# EAGLE board Rage Bridge v2 v123 (EAGLE 9.7.0)
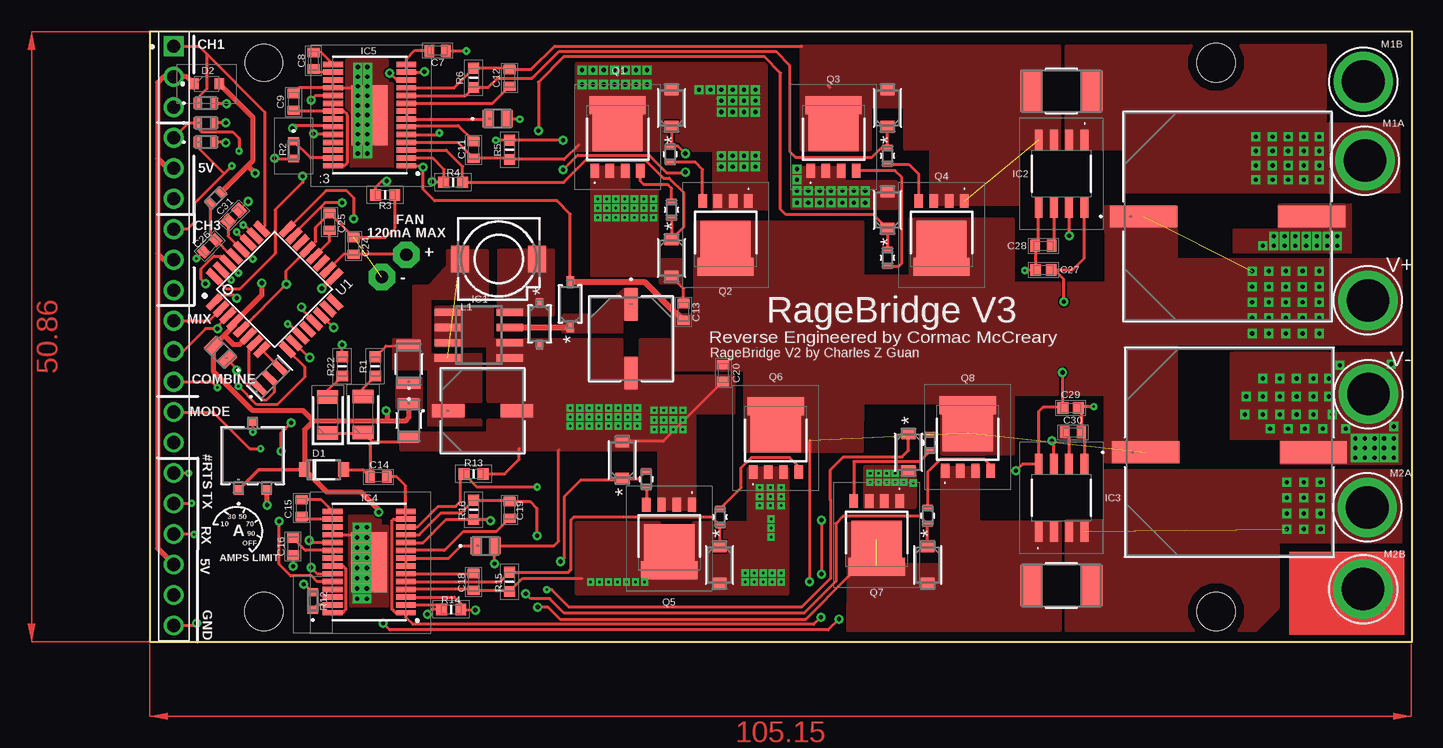
[diagram p0: board, top side]
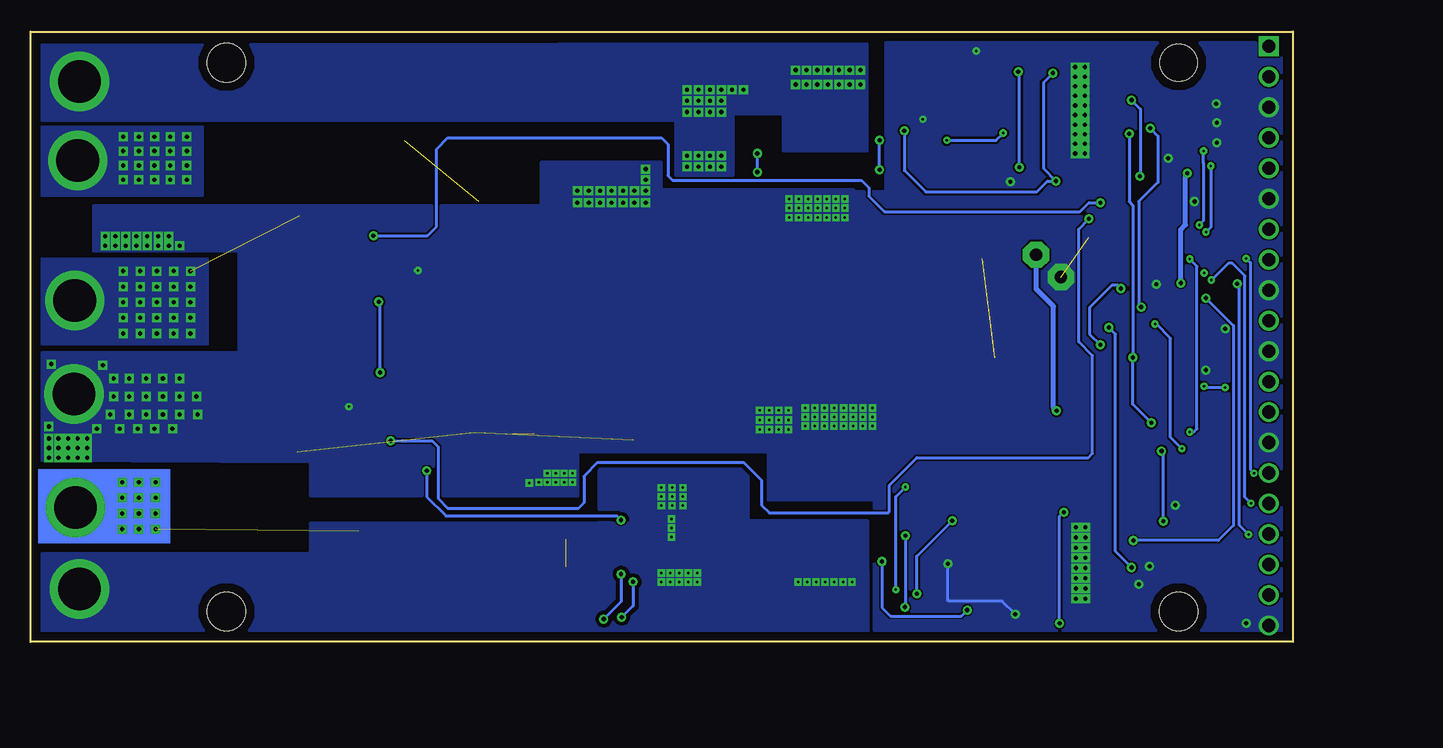
[diagram p1: board, bottom side, seen from below]

Size 105.23 x 50.86 mm. Coordinates in mm from the lower left corner, seen from the top.
Outline: 0,50.86 0,0 105.23,0 105.23,50.86 0,50.86
Copper layers (1*16): Top / Bottom
Stack-up Default Layer Stack: Top User Defined 0.035mm / Dielectric-1 User Defined 1.5mm / Bottom User Defined 0.035mm
Design rules: minimum copper width 6mil, minimum drill size 0.2mm, copper clearance wire_polygon to wire_polygon 6mil, copper clearance wire_polygon to pad_smd 6mil, copper clearance wire_polygon to via 6mil, copper clearance pad_smd to pad_smd 6mil, copper clearance pad_smd to via 6mil, copper clearance via to via 6mil, copper clearance smd to pad (same net) 6mil, copper clearance smd to via (same net) 6mil, copper clearance smd to smd (same net) 6mil, dimension clearance 0.75mm, via restrict clearance 0mil, restrict clearance 0mil, drill distance 6mil, keepout clearance 0mil
Holes 3.1 mm at 9.53,48.26
Holes 3.2 mm at 9.53,2.54 88.9,2.54 88.9,48.26

## Footprints (pad centres in the part's own frame; a part is rotated, then mirrored left to right if it is on the bottom)
CAP_PAN_EEE_J16_PAN-L = smd 5.612 x 1.799: 1 -6.994,0; 2 6.994,0
CAP_PAN_EEE_D_PAN-L = smd 2.691 x 1.062: 1 -2.853,0; 2 2.853,0
CAP_1206X_AVX-L = smd 0.912 x 1.753: 1 -1.396,0; 2 1.396,0
CAP_08051A0R8CAT2A_AVX-L = smd 0.912 x 1.398: 1 -0.799,0; 2 0.799,0
CAPC1608X90N = smd 0.78 x 0.99: 1 -0.7,0; 2 0.7,0
CAP_06033D104JAT2A-L = smd 0.65 x 0.91: 1 -0.7,0; 2 0.7,0
CAPC1608X90N' = smd 0.75 x 0.94: 1 -0.7,0; 2 0.7,0
CAPC1608X95N = smd 0.89 x 0.98: 1 -0.65,0; 2 0.65,0
SOD-123_STM = smd 0.954 x 0.619: 1 -1.854,0; 2 1.854,0
SOD-123_STM-L = smd 0.654 x 0.579: 1 -1.804,0; 2 1.804,0
SMFSERIES_LTF-L = smd 0.989 x 1.144: 1 -1.561,0; 2 1.561,0
SOD123FL = smd 0.91 x 1.22: A 1.625,0; C -1.625,0
SD0805S020S1R0 = smd 0.8 x 0.9: 1 -1.05,0; 2 1.05,0
DPADS_0400-S = drill 1.016 pad 2.184 octagon: PAD 0,0
TSOP8 = smd 0.6 x 2.2: 1 -1.905,-2.6; 2 -0.635,-2.6; 3 0.635,-2.6; 4 1.905,-2.6; 5 1.905,2.6; 6 0.635,2.6; 7 -0.635,2.6; 8 -1.905,2.6
ACS711ELCTR25ABT = smd 0.65 x 1.75: 1 -1.905,-2.8; 2 -0.635,-2.8; 3 0.635,-2.8; 4 1.905,-2.8; 5 1.905,2.8; 6 0.635,2.8; 7 -0.635,2.8; 8 -1.905,2.8
A3944KLPTRT = smd 0.45 x 1.65: 1 -4.225,-3.05; 2 -3.575,-3.05; 3 -2.925,-3.05; 4 -2.275,-3.05; 5 -1.625,-3.05; 6 -0.975,-3.05; 7 -0.325,-3.05; 8 0.325,-3.05; 9 0.975,-3.05; 10 1.625,-3.05; 11 2.275,-3.05; 12 2.925,-3.05; 13 3.575,-3.05; 14 4.225,-3.05; 15 4.225,3.05; 16 3.575,3.05; 17 2.925,3.05; 18 2.275,3.05; 19 1.625,3.05; 20 0.975,3.05; 21 0.325,3.05; 22 -0.325,3.05; 23 -0.975,3.05; 24 -1.625,3.05; 25 -2.275,3.05; 26 -2.925,3.05; 27 -3.575,3.05; 28 -4.225,3.05 | smd 5 x 3: 29 0,0
61302011121 = drill 1.1 square: 1 -24.13,0 | drill 1.1: 2 -21.59,0; 3 -19.05,0; 4 -16.51,0; 5 -13.97,0; 6 -11.43,0; 7 -8.89,0; 8 -6.35,0; 9 -3.81,0; 10 -1.27,0; 11 1.27,0; 12 3.81,0; 13 6.35,0; 14 8.89,0; 15 11.43,0; 16 13.97,0; 17 16.51,0; 18 19.05,0; 19 21.59,0; 20 24.13,0
SLF7045 = smd 1.5 x 2.2: 1 -3.2,0; 2 3.2,0
IND_NLFV32T_TDK = smd 0.914 x 2.007: 1 -1.6,0; 2 1.6,0
LEDC3216X195N = smd 1.1 x 1.75: 1 -1.5,0; 2 1.5,0
4.95/3.55 = drill 3.55 pad 4.95: 1 0,0
PSMN2R055YLHX = smd 0.7 x 1.15: 1 -1.905,-2.737; 2 -0.635,-2.737; 3 0.635,-2.737; 4 1.905,-2.737 | smd 4.7 x 1.5: 5 0,2.737 | smd 4.2 x 3.1: 6 0,0.438
RESC1608X55N = smd 0.9 x 0.95: 1 -0.8,0; 2 0.8,0
ERA3KV_(0603) = smd 0.65 x 0.9: 1 -0.725,0; 2 0.725,0
RES_TNPW0603_VIS-L = smd 0.45 x 0.8: 1 -0.7,0; 2 0.7,0
STA_CSNL2512(0.5)_STP-L = smd 1.778 x 3.378: 1 -2.515,0; 2 2.515,0
RES_CHP0603_BRN-L = smd 0.608 x 0.839: 1 -0.647,0; 2 0.647,0
QFP80P900X900X120-32N = smd 1.5 x 0.55: 1 -4.3,2.8; 2 -4.3,2; 3 -4.3,1.2; 4 -4.3,0.4; 5 -4.3,-0.4; 6 -4.3,-1.2; 7 -4.3,-2; 8 -4.3,-2.8; 17 4.3,-2.8; 18 4.3,-2; 19 4.3,-1.2; 20 4.3,-0.4; 21 4.3,0.4; 22 4.3,1.2; 23 4.3,2; 24 4.3,2.8 | smd 0.55 x 1.5: 9 -2.8,-4.3; 10 -2,-4.3; 11 -1.2,-4.3; 12 -0.4,-4.3; 13 0.4,-4.3; 14 1.2,-4.3; 15 2,-4.3; 16 2.8,-4.3; 25 2.8,4.3; 26 2,4.3; 27 1.2,4.3; 28 0.4,4.3; 29 -0.4,4.3; 30 -1.2,4.3; 31 -2,4.3; 32 -2.8,4.3
ST-4ETB502_NDC-L = smd 0.833 x 0.756: 1 -1.175,-2.872; 2 1.175,-2.872; 3 0,2.872
CSTCE_V_MUR = smd 0.508 x 1.448: 1 -1.2,0; 2 0,0; 3 1.2,0

## Placement (x,y rotation side)
C1  EEE-HD1V152AMCAP_PAN_EEE_J16_PAN-L  [CAP_PAN_EEE_J16_PAN-L]  89.85,35.45 0 top
C2  EEE-HD1V152AMCAP_PAN_EEE_J16_PAN-L  [CAP_PAN_EEE_J16_PAN-L]  90,15.8 0 top
C3  EEE-HA1C101WPCAP_PAN_EEE_D_PAN-L  [CAP_PAN_EEE_D_PAN-L]  27.74,19.26 0 top
C4  12066D107MAT2ACAP_1206X_AVX-L  [CAP_1206X_AVX-L]  21.6,18.45 270 top
C5  08056C104JAT2ACAP_08051A0R8CAT2A_AVX-L  [CAP_08051A0R8CAT2A_AVX-L]  5.9,24.13 135 top
C6  EEE-1VA470WAPCAP_PAN_EEE_D_PAN-L  [CAP_PAN_EEE_D_PAN-L]  40.13,25.26 270 top
C7  06035C105KAT2A  [CAPC1608X90N]  24,49.27 180 top
C8  06035C105KAT2A  [CAPC1608X90N]  13.65,48.43 90 top
C9  06035C105KAT2A  [CAPC1608X90N]  12,45 270 top
C10  08056C104JAT2ACAP_08051A0R8CAT2A_AVX-L  [CAP_08051A0R8CAT2A_AVX-L]  29,43.6 0 top
C11  06035C105KAT2A  [CAPC1608X90N]  27,41 270 top
C12  06035C105KAT2A  [CAPC1608X90N]  30,47 270 top
C13  06035C105KAT2A  [CAPC1608X90N]  44.5,27.5 90 top
C14  06035C105KAT2A  [CAPC1608X90N]  19.07,13.75 0 top
C15  06035C105KAT2A  [CAPC1608X90N]  12.65,11.15 90 top
C16  06035C105KAT2A  [CAPC1608X90N]  11.95,7.95 90 top
C17  08056C104JAT2ACAP_08051A0R8CAT2A_AVX-L  [CAP_08051A0R8CAT2A_AVX-L]  28,8 0 top
C18  06035C105KAT2A  [CAPC1608X90N]  27,5 270 top
C19  06035C105KAT2A  [CAPC1608X90N]  30,11 270 top
C20  06035C105KAT2A  [CAPC1608X90N]  47.8,22.4 270 top
C21  06036A152JAT2ACAP_06033D104JAT2A-L  [CAP_06033D104JAT2A-L]  4.7,44.9 0 top
C22  06036A152JAT2ACAP_06033D104JAT2A-L  [CAP_06033D104JAT2A-L]  4.7,43.25 0 top
C23  06036A152JAT2ACAP_06033D104JAT2A-L  [CAP_06033D104JAT2A-L]  4.7,41.65 0 top
C24  06035C105KAT2A  [CAPC1608X90N]  17,33 270 top
C25  06035C105KAT2A  [CAPC1608X90N]  15,35 270 top
C26  GCM188R71C104KA37J  [CAPC1608X90N']  5,33 45 top
C27  C0603X102K5GACAUTO  [CAPC1608X95N]  74.5,31 180 top
C28  06035C105KAT2A  [CAPC1608X90N]  74.5,33 180 top
C29  C0603X102K5GACAUTO  [CAPC1608X95N]  76.77,19.5 0 top
C30  06035C105KAT2A  [CAPC1608X90N]  76.96,17.46 0 top
C31  C0603X102K5GACAUTO  [CAPC1608X95N]  7,35.5 45 top
CR1  STPS0560ZSOD-123_STM  [SOD-123_STM]  35.05,28.15 90 top
CR2  STPS0560ZSOD-123_STM-L  [SOD-123_STM-L]  32.5,26.5 270 top
CR3  SMF16ASMFSERIES_LTF-L  [SMFSERIES_LTF-L]  43.5,44.5 90 top
CR4  SMF16ASMFSERIES_LTF-L  [SMFSERIES_LTF-L]  61.5,44.5 90 top
CR5  SMF16ASMFSERIES_LTF-L  [SMFSERIES_LTF-L]  61.5,36 90 top
CR6  SMF16ASMFSERIES_LTF-L  [SMFSERIES_LTF-L]  43.5,32 270 top
CR7  SMF16ASMFSERIES_LTF-L  [SMFSERIES_LTF-L]  47.5,6.4 270 top
CR8  SMF16ASMFSERIES_LTF-L  [SMFSERIES_LTF-L]  64.85,6.4 270 top
CR9  SMF16ASMFSERIES_LTF-L  [SMFSERIES_LTF-L]  63.25,15.8 270 top
CR10  SMF16ASMFSERIES_LTF-L  [SMFSERIES_LTF-L]  39.4,15.15 90 top
D1  SMF5.0AT1  [SOD123FL]  14.53,14.35 0 top
D2  SD0805S020S1R0  [SD0805S020S1R0]  4.75,46.5 0 top
E1  DPADS_PAD-0400-S  [DPADS_0400-S]  21.4,32.25 0 top
E2  DPADS_PAD-0400-S  [DPADS_0400-S]  19.35,30.4 0 top
IC1  LM2594  [TSOP8]  27.43,25.57 270 top
IC2  ACS714ELCTR-30A-T  [ACS711ELCTR25ABT]  76,39 180 top
IC3  ACS714ELCTR-30A-T  [ACS711ELCTR25ABT]  76,12 0 top
IC4  A3941KLPTR-T  [A3944KLPTRT]  18.3,6.65 90 top
IC5  A3941KLPTR-T  [A3944KLPTRT]  18.35,43.9 90 top
J1  61302011121  [61302011121]  2,25.5 270 top
L1  SLF7045  [SLF7045]  29.09,31.91 180 top
L2  NLFV32T-3R3M-EFIND_NLFV32T_TDK  [IND_NLFV32T_TDK]  21.59,23.14 90 top
LED1  156120BS82500  [LEDC3216X195N]  17.8,18.95 90 top
LED2  156120BS82500  [LEDC3216X195N]  14.85,18.9 90 top
M1A  4.95/3.55WIREPAD  [4.95/3.55]  101.3,40.1 0 top
M1B  4.95/3.55WIREPAD  [4.95/3.55]  101.16,46.69 0 top
M2A  4.95/3.55WIREPAD  [4.95/3.55]  101.5,11.2 0 top
M2B  4.95/3.55WIREPAD  [4.95/3.55]  101.15,4.4 0 top
Q1  PSMNR90-40YLHX  [PSMN2R055YLHX]  39,42 0 top
Q2  PSMNR90-40YLHX  [PSMN2R055YLHX]  48,34 180 top
Q3  PSMNR90-40YLHX  [PSMN2R055YLHX]  57,42 0 top
Q4  PSMNR90-40YLHX  [PSMN2R055YLHX]  66,34 180 top
Q5  PSMNR90-40YLHX  [PSMN2R055YLHX]  43.3,8.7 180 top
Q6  PSMNR90-40YLHX  [PSMN2R055YLHX]  52.2,16.9 0 top
Q7  PSMNR90-40YLHX  [PSMN2R055YLHX]  60.6,9 180 top
Q8  PSMNR90-40YLHX  [PSMN2R055YLHX]  68.2,17 0 top
R1  CHP0603AFX-1001ELF  [RESC1608X55N]  18.8,22.95 270 top
R2  ERA-3VEB2202V  [ERA3KV_(0603)]  12,41 270 top
R3  CR0603-FX-2703ELF  [RESC1608X55N]  19.64,37.25 0 top
R4  CR0603-FX-2703ELF  [RESC1608X55N]  25.29,38.3 0 top
R5  CR0603-FX-2703ELF  [RESC1608X55N]  30,41 270 top
R6  CR0603-FX-2703ELF  [RESC1608X55N]  27,47 270 top
R7  TNPW0603100KBEEARES_TNPW0603_VIS-L  [RES_TNPW0603_VIS-L]  43.39,40.64 270 top
R8  TNPW0603100KBEEARES_TNPW0603_VIS-L  [RES_TNPW0603_VIS-L]  43.5,36 90 top
R9  TNPW0603100KBEEARES_TNPW0603_VIS-L  [RES_TNPW0603_VIS-L]  61.5,40.5 270 top
R10  TNPW0603100KBEEARES_TNPW0603_VIS-L  [RES_TNPW0603_VIS-L]  61.5,32 270 top
R11  CSNL2512FTL500STA_CSNL2512(0.5)_STP-L  [STA_CSNL2512(0.5)_STP-L]  76,45.9 0 top
R12  ERA-3VEB2202V  [ERA3KV_(0603)]  13.6,3.4 90 top
R13  CR0603-FX-2703ELF  [RESC1608X55N]  27,14 0 top
R14  CR0603-FX-2703ELF  [RESC1608X55N]  25.14,2.7 0 top
R15  CR0603-FX-2703ELF  [RESC1608X55N]  30,5 270 top
R16  CR0603-FX-2703ELF  [RESC1608X55N]  27,11 270 top
R17  TNPW0603100KBEEARES_TNPW0603_VIS-L  [RES_TNPW0603_VIS-L]  47.55,10.4 90 top
R18  TNPW0603100KBEEARES_TNPW0603_VIS-L  [RES_TNPW0603_VIS-L]  41.4,13.55 270 top
R19  TNPW0603100KBEEARES_TNPW0603_VIS-L  [RES_TNPW0603_VIS-L]  64.85,10.5 90 top
R20  TNPW0603100KBEEARES_TNPW0603_VIS-L  [RES_TNPW0603_VIS-L]  65.05,16.6 270 top
R21  CSNL2512FTL500STA_CSNL2512(0.5)_STP-L  [STA_CSNL2512(0.5)_STP-L]  76,4.7 0 top
R22  CHP0603AFX-1001ELF  [RESC1608X55N]  16.05,22.95 270 top
R23  CHP0603AFX-1003ELFRES_CHP0603_BRN-L  [RES_CHP0603_BRN-L]  5.5,37 45 top
U1  ATMEGA328P-AU  [QFP80P900X900X120-32N]  10.41,29.38 45 top
U2  ST-4ETB502ST-4ETB502_NDC-L  [ST-4ETB502_NDC-L]  8.58,15.53 0 top
U3  CSTCE16M0V53A-R0CSTCE_V_MUR  [CSTCE_V_MUR]  10,22 45 top
V+  4.95/3.55WIREPAD  [4.95/3.55]  101.55,28.45 0 top
V-  4.95/3.55WIREPAD  [4.95/3.55]  101.6,20.65 0 top

## Library data of the parts
C1 C2 = Library; COPYRIGHT: Copyright (C) 2023 Ultra Librarian. All rights reserved.; MANUFACTURER_PART_NUMBER: EEE-HD1V152AM; MFR_NAME: Panasonic
C3 = Modified Parts; COPYRIGHT: Copyright (C) 2023 Ultra Librarian. All rights reserved.; DIGI-KEY_PART_NUMBER_1: PCE4180TR-ND; DIGI-KEY_PART_NUMBER_2: PCE4180CT-ND; DIGI-KEY_PART_NUMBER_3: PCE4180DKR-ND; MANUFACTURER_PART_NUMBER: EEE-HA1C101WP; MFR_NAME: Panasonic
C4 = 581-12066D107MAT2A; COPYRIGHT: Copyright (C) 2023 Ultra Librarian. All rights reserved.; MANUFACTURER_PART_NUMBER: 12066D107MAT2A; MFR_NAME: KYOCERA AVX
C5 C10 C17 = 08056C106MAT2A; COPYRIGHT: Copyright (C) 2023 Ultra Librarian. All rights reserved.; MANUFACTURER_PART_NUMBER: 08056C104JAT2A; MFR_NAME: KYOCERA AVX
C6 = Modified Parts; COPYRIGHT: Copyright (C) 2023 Ultra Librarian. All rights reserved.; MANUFACTURER_PART_NUMBER: EEE-1VA470WAP; MFR_NAME: Panasonic
C7-C9 C11-C16 C18-C20 C24 C25 C28 C30 = 06035C105KAT2A; DESCRIPTION: Multilayer Ceramic Capacitors MLCC - SMD/SMT 1.0UF 50V 10% 0603; HEIGHT: 0.9mm; MANUFACTURER_NAME: AVX; MANUFACTURER_PART_NUMBER: 06035C105KAT2A; MOUSER_PART_NUMBER: 581-06035C105KAT2A; MOUSER_PRICE-STOCK: https://www.mouser.co.uk/ProductDetail/AVX/06035C105KAT2A/?qs=%252BdQmOuGyFcGCdIIWh6fU7Q%3D%3D
C21-C23 = 06036A152JAT2A; COPYRIGHT: Copyright (C) 2023 Ultra Librarian. All rights reserved.; MANUFACTURER_PART_NUMBER: 06036A152JAT2A; MFR_NAME: KYOCERA AVX
C26 = GCM188R71C104KA37J; DESCRIPTION: Multilayer Ceramic Capacitors MLCC - SMD/SMT .1uF 16Volts 10%; HEIGHT: 0.9mm; MANUFACTURER_NAME: Murata Electronics; MANUFACTURER_PART_NUMBER: GCM188R71C104KA37J; MOUSER_PART_NUMBER: 81-GCM188R71C104KA7J; MOUSER_PRICE-STOCK: https://www.mouser.co.uk/ProductDetail/Murata-Electronics/GCM188R71C104KA37J?qs=bGEzvQhTDnZD08oWyjLpYQ%3D%3D
C27 C29 C31 = C0603X102K5GACAUTO; DESCRIPTION: SMD Auto C0G Flex, Ceramic, 1000 pF, 10%, 50 VDC, 125 VDC, 125C, -55C, C0G, SMD, MLCC, FT-CAP, Ultra-Stable, Automotive Grade, 0.1 % , 100 GOhms, 4.6 mg, 0603, 1.6mm, 0.8mm, 0.8mm, 0.58mm, 0.45mm, 4000, 78 Weeks, 120; HEIGHT: 0.95mm; MANUFACTURER_NAME: KEMET; MANUFACTURER_PART_NUMBER: C0603X102K5GACAUTO; MOUSER_PART_NUMBER: 80-C0603X102K5GAUTO; MOUSER_PRICE-STOCK: https://www.mouser.co.uk/ProductDetail/KEMET/C0603X102K5GACAUTO?qs=Rp5uXu7WBW%2FQ943CZtK%2F6w%3D%3D
CR1 CR2 = Modified Parts; COPYRIGHT: Copyright (C) 2023 Ultra Librarian. All rights reserved.; MANUFACTURER_PART_NUMBER: STPS0560Z; MFR_NAME: STMicroelectronics
CR3-CR10 = Modified Parts; COPYRIGHT: Copyright (C) 2023 Ultra Librarian. All rights reserved.; MANUFACTURER_PART_NUMBER: SMF16A; MFR_NAME: Littelfuse Inc
D1 = diode
D2 = SD0805S020S1R0; DESCRIPTION: AVX - SD0805S020S1R0 - DIODE, SCHOTTKY, 1A, 20V, SOD-323; HEIGHT: 1mm; MANUFACTURER_NAME: AVX; MANUFACTURER_PART_NUMBER: SD0805S020S1R0; MOUSER_PART_NUMBER: 581-SD0805S020S1R0; MOUSER_PRICE-STOCK: https://www.mouser.co.uk/ProductDetail/AVX-Kyocera/SD0805S020S1R0?qs=jCA%252BPfw4LHbpkAoSnwrdjw%3D%3D
E1 E2 = 52101-101-REV-A_v16; BOM: EXCLUDE
IC1 = LM2594
IC2 IC3 = ACS714ELCTR-30A-T; ARROW_PART_NUMBER: ACS714ELCTR-30A-T; ARROW_PRICE-STOCK: https://www.arrow.com/en/products/acs714elctr-30a-t/allegro-microsystems?region=nac; DESCRIPTION: Automotive Grade, Fully Integrated, Hall-Effect-Based Linear Current Sensor IC with 2.1 kVRMS Voltage Isolation and a Low-Resistance Current Conductor; HEIGHT: 1.75mm; MANUFACTURER_NAME: Allegro Microsystems; MANUFACTURER_PART_NUMBER: ACS714ELCTR-30A-T
IC4 IC5 = A3941KLPTR-T; ARROW_PART_NUMBER: A3941KLPTR-T; ARROW_PRICE-STOCK: https://www.arrow.com/en/products/a3941klptr-t/allegro-microsystems; DESCRIPTION: Automotive Full Bridge MOSFET Driver; HEIGHT: 1.2mm; MANUFACTURER_NAME: Allegro Microsystems; MANUFACTURER_PART_NUMBER: A3941KLPTR-T
J1 = Headers; CREATED_BY: PCBLayout.com; DIGIKEY_PART_NUMBER: 732-5329-ND; MANUFACTURER: Wurth Electronics Inc.; MPN: 61302011121
L1 = inductors; SPICEPREFIX: L
L2 = Modified Parts; COPYRIGHT: Copyright (C) 2023 Ultra Librarian. All rights reserved.; MANUFACTURER_PART_NUMBER: NLFV32T-3R3M-EF; MFR_NAME: TDK
LED1 LED2 = 156120BS82500; DESCRIPTION: 3.9 V Blue LED 3216 (1206) SMD, Wurth Elektronik WL-SMRW 156120BS82500; HEIGHT: 1.95mm; MANUFACTURER_NAME: Wurth Elektronik; MANUFACTURER_PART_NUMBER: 156120BS82500; MOUSER_PART_NUMBER: 710-156120BS82500; MOUSER_PRICE-STOCK: https://www.mouser.co.uk/ProductDetail/Wurth-Elektronik/156120BS82500?qs=5aG0NVq1C4ycHR%252BnBedTqQ%3D%3D
M1A M1B M2A M2B V+ V- = Battery/Output TH
Q1-Q8 = PSMNR90-40YLHX; DESCRIPTION: MOSFET N-CH 40 V LOGIC LEVEL; HEIGHT: 1.25mm; MANUFACTURER_NAME: Nexperia; MANUFACTURER_PART_NUMBER: PSMNR90-40YLHX; MOUSER_PART_NUMBER: 771-PSMNR90-40YLHX; MOUSER_PRICE-STOCK: https://www.mouser.co.uk/ProductDetail/Nexperia/PSMNR90-40YLHX?qs=Zz7%252BYVVL6bENGG9A3AEHCg%3D%3D
R1 R22 = CHP0603AFX-1001ELF; DESCRIPTION: Thick Film Resistors - SMD ResHighPowerA 0603 1k 1% 1/3W TC100; HEIGHT: 0.55mm; MANUFACTURER_NAME: Bourns; MANUFACTURER_PART_NUMBER: CHP0603AFX-1001ELF; MOUSER_PART_NUMBER: 652-CHP0603AFX1001EL; MOUSER_PRICE-STOCK: https://www.mouser.co.uk/ProductDetail/Bourns/CHP0603AFX-1001ELF?qs=BJlw7L4Cy79wF3rZ%2FmXmqQ%3D%3D
R2 R12 = 3VEB2202V; DESCRIPTION: Chip Resistor 0603 (1608 Metric) Anti-Sulfur, Automotive AEC-Q200 Thin Film; HEIGHT: 0.4mm; MANUFACTURER_NAME: Panasonic; MANUFACTURER_PART_NUMBER: ERA-3VEB2202V; MOUSER_PART_NUMBER: 667-ERA-3VEB2202V; MOUSER_PRICE-STOCK: https://www.mouser.co.uk/ProductDetail/Panasonic/ERA-3VEB2202V?qs=OlC7AqGiEDmCEFJMvW451w%3D%3D
R3-R6 R13-R16 = CR0603-FX-2703ELF; DESCRIPTION: Thick Film Resistors - SMD 270K ohm 1%; HEIGHT: 0.55mm; MANUFACTURER_NAME: Bourns; MANUFACTURER_PART_NUMBER: CR0603-FX-2703ELF; MOUSER_PART_NUMBER: 652-CR0603FX-2703ELF
R7-R10 R17-R20 = TNPW060310R0DEEA; COPYRIGHT: Copyright (C) 2023 Ultra Librarian. All rights reserved.; MANUFACTURER_PART_NUMBER: TNPW0603100KBEEA; MFR_NAME: Vishay
R11 R21 = 2023-12-17_00-40-17_Library; COPYRIGHT: Copyright (C) 2023 Ultra Librarian. All rights reserved.; MANUFACTURER_PART_NUMBER: CSNL2512FTL500; MFR_NAME: Stackpole International
R23 = CHP0603AFX-1003ELF; COPYRIGHT: Copyright (C) 2023 Ultra Librarian. All rights reserved.; MANUFACTURER_PART_NUMBER: CHP0603AFX-1003ELF; MFR_NAME: Bourns Electronics
U1 = ATMEGA328P-AU; MANUFACTURER: Atmel
U2 = ST-4ETB502; COPYRIGHT: Copyright (C) 2023 Ultra Librarian. All rights reserved.; MANUFACTURER_PART_NUMBER: ST-4ETB502; MFR_NAME: Nidec Copal Electronics
U3 = CSTCE16M0V53A-R0; COPYRIGHT: Copyright (C) 2023 Ultra Librarian. All rights reserved.; MANUFACTURER_PART_NUMBER: CSTCE16M0V53A-R0; MFR_NAME: Murata

## Nets
#RTS: C26.2 R23.1 U1.29
+5V_LINE: C4.1 C5.2 C24.2 C27.1 C29.1 D1.C D2.2 E1.PAD IC2.8 IC3.8 L2.1 R23.2 U1.4 U1.6 U1.18 U2.1
ADJUST: C31.1 U1.28 U2.3
BAT_V: C1.1 C2.1 C7.2 C13.1 C14.2 C20.1 CR1.2 IC4.1 IC4.13 IC4.14 IC5.1 IC5.13 IC5.14 Q2.5 Q2.6 Q4.5 Q4.6 Q6.5 Q6.6 Q8.5 Q8.6 V+.1
CH1: C21.1 J1.1 U1.25
CH2: C22.1 J1.4 U1.26
CH3: C23.1 J1.7 U1.27
CLK: U1.7 U3.1
CLK(1): U1.8 U3.3
COMBINE: J1.12 U1.9
CPULED: R22.1 U1.17
GHA: CR4.1 IC5.10 R6.2 R9.1
GHA(1): CR8.1 IC4.10 R16.2 R19.1
GHB: CR3.1 IC5.5 R5.1 R7.1
GHB(1): CR7.1 IC4.5 R15.1 R17.1
GLA: CR5.1 IC5.12 R3.1 R10.1
GLA(1): CR9.1 IC4.12 R13.1 R20.1
GLB: CR6.1 IC5.3 R4.2 R8.1
GLB(1): CR10.1 IC4.3 R14.2 R18.1
GND: C1.2 C2.2 C3.2 C4.2 C5.1 C6.2 C7.1 C9.1 C10.2 C13.2 C14.1 C16.1 C17.2 C20.2 C21.2 C22.2 C23.2 C24.1 C25.1 C27.2 C28.2 C29.2 C30.2 C31.2 CR2.2 CR5.2 CR6.2 CR9.2 CR10.2 D1.A E2.PAD IC1.1 IC1.2 IC1.3 IC1.5 IC1.6 IC2.5 IC3.5 IC4.2 IC4.17 IC4.18 IC4.29 IC5.2 IC5.17 IC5.18 IC5.29 J1.3 J1.6 J1.9 J1.11 J1.14 J1.20 LED1.1 LED2.1 Q1.1 Q1.2 Q1.3 Q3.1 Q3.2 Q3.3 Q5.1 Q5.2 Q5.3 Q7.1 Q7.2 Q7.3 R2.2 R3.2 R4.1 R12.2 R13.2 R14.1 U1.3 U1.5 U1.21 U2.2 U3.2 V-.1
MIX: J1.10 U1.2
MODE: J1.13 U1.11
N$1: C12.2 IC5.9
N$2: C8.2 IC5.15
N$3: C6.1 CR1.1 IC1.7
N$5: CR2.1 IC1.8 L1.1
N$6: C3.1 IC1.4 L1.2 L2.2 R1.1
N$7: IC2.1 IC2.2 M1A.1 R11.2
N$8: LED1.2 R1.2
N$9: IC5.27 R2.1
N$11: C11.1 IC5.6
N$12: C17.1 IC4.7 IC4.8
N$15: Q2.4 R7.2
N$16: Q8.4 R19.2
N$18: C16.2 IC4.20 IC4.21 IC4.22 IC4.28
N$22: C15.1 IC4.16
N$23: C15.2 IC4.15
N$24: IC3.3 IC3.4 M2A.1 R21.2
N$29: Q6.4 R17.2
N$31: Q1.4 R8.2
N$32: Q3.4 R10.2
N$33: C26.1 J1.15
N$34: IC4.27 R12.1
N$35: C10.1 IC5.7 IC5.8
N$36: C8.1 IC5.16
N$39: C9.2 IC5.20 IC5.21 IC5.22 IC5.28
N$41: C19.2 IC4.9
N$42: C18.1 IC4.6
N$49: Q5.4 R18.2
N$50: Q7.4 R20.2
N$52: C28.1 IC2.6
N$61: LED2.2 R22.2
N$63: C25.2 U1.20
N$73: C30.1 IC3.6
N$79: Q4.4 R9.2
PHASE: IC5.19 U1.32
PHASE(1): IC4.19 U1.1
PIN_5V: D2.1 J1.2 J1.5 J1.8 J1.18
PWMH: IC5.23 U1.13
PWMH(1): IC4.23 U1.14
RESET: IC4.24 IC5.24 U1.10
RX: J1.17 U1.30
SA: C12.1 CR4.2 IC2.3 IC2.4 IC5.11 Q3.5 Q3.6 Q4.1 Q4.2 Q4.3 R6.1 R11.1
SA(1): C19.1 CR8.2 IC3.1 IC3.2 IC4.11 Q7.5 Q7.6 Q8.1 Q8.2 Q8.3 R16.1 R21.1
SB: C11.2 CR3.2 IC5.4 M1B.1 Q1.5 Q1.6 Q2.1 Q2.2 Q2.3 R5.2
SB(1): C18.2 CR7.2 IC4.4 M2B.1 Q5.5 Q5.6 Q6.1 Q6.2 Q6.3 R15.2
TX: J1.16 U1.31
VIOUT: IC2.7 U1.23
VIOUT(1): IC3.7 U1.24

## Tracks (layer width: path | path; a pad name or v marks a point on that pad's centre or on a via)
#RTS
  Top 0.254: R23.1 5.04,33.95 C26.2 6.85,32.14 U1.29
+5V_LINE  (via drill 0.35)
  Top 0.254: C5.2 | U1.18 16.16,32.3 C24.2 21.35,32.3 E1.PAD | 76.07,19.55 74.45,19.55 74.09,19.2 IC3.8 72.75,14.8 v72.2,14.25 | 76.07,19.55 C29.1 | C27.1 75.4,31 | 75.4,31 76.95,31 77.91,31.95 IC2.8 | v56,10.15 v56,5.65 | v57.45,1.9 56.55,1 20,1 v19.45,1.55 | v76.1,22.45 76.07,22.42 76.07,19.55 | v76.2,28.35 76.2,30.2 75.4,31
  Top 0.305: U2.1 9.1,14.35 D1.C
  Top 0.406: 6.2,25.55 C5.2 | 6.2,25.55 6.95,24.8 7.53,24.8 U1.6 | C4.1 21.6,18.7 21.3,18.4 19.8,18.4 | C5.2 5.35,22.5 8.56,19.29 12.76,19.29 13.62,18.43 13.62,18.4 | R23.2 8.18,39.67 | 8.18,39.67 8.6,40.1 8.6,43.7 D2.2 | v9.35,29.9 9.35,28.89 U1.4 7.09,26.45 6.2,25.55 | v8.8,39.05 8.18,39.67 | v19.7,19.25 19.8,19.15 19.8,18.4 | 19.8,18.4 13.62,18.4 | 13.62,18.4 12.9,17.68 D1.C 14.76,12.5 17.6,12.5 19.1,11 v19.1,10.8
  Bottom 0.254: v72.2,14.25 72.2,12.1 70.6,10.5 56.35,10.5 v56,10.15 | v57.45,1.9 56,3.35 v56,5.65 | v19.45,1.55 19.45,10.45 v19.1,10.8 | v76.1,22.45 76.1,28.25 v76.2,28.35
  Bottom 0.406: v9.35,29.9 9.35,34.35 8.95,34.75 8.95,38.75 v8.8,39.05 | v19.7,19.25 19.95,19.5 19.95,27.95 21.4,29.4 E1.PAD
  pour Top (no thermals): 20.5,22.05 22.75,22.05 22.75,19.3 20.5,19.3
ADJUST  (via drill 0.2)
  Top 0.254: U2.3 8.58,17.52 v8.6,17.5 | C31.1 6.54,33.81 U1.28 8.46,31.9 v8.6,31.9
  Bottom 0.254: v8.6,17.5 8.25,17.5 8,17.75 8,31.3 v8.6,31.9
BAT_V  (via drill 0.35)  (3 unrouted)
  Top 0.254: C7.2 23.15,49.27 23.12,49.3 22.1,49.3 21.4,48.6 IC5.14 IC5.13 22.88,47.48 v22.9,47.5 | IC5.1 22.68,39.67 v22.8,39.55 22.8,37.7 23.75,36.75 33.95,36.75 35.05,35.65 CR1.2 | C14.2 20.6,13.75 21.35,13 IC4.14 IC4.13 20.32,10.22 20.2,10.1 20.2,2.7 20.48,2.42 IC4.1 21.35,2.05 21.95,1.45 55.35,1.45 v55.95,2.05 | 55,16.8 v55,5
  Top 0.508: C13.1 43.9,27.4 43.84,27.4 41.24,30 CR1.2
  Bottom 0.254: v22.8,39.55 22.8,47.3 22.9,47.4 v22.9,47.5 | v55,5 55,3 v55.95,2.05
  other vias: 97.5,30.9 97.5,29.6 97.5,28.3 97.5,27 97.5,25.7 96.1,30.9 96.1,29.6 96.1,28.3 96.1,27 96.1,25.7 94.7,30.9 94.7,29.6 94.7,28.3 94.7,27 94.7,25.7 93.3,30.9 93.3,29.6 93.3,28.3 93.3,27 93.3,25.7 91.9,30.9 91.9,29.6 91.9,28.3 91.9,27 91.9,25.7
  pour Top (no thermals): 59.54,20.76 59.54,35.1 45.35,35.1 45.35,27.35 43.7,27.35 43.7,22.55 49.5,22.55 49.5,15.75 59.5,15.75
  pour Top (no thermals): 58.75,30.6 63.3,30.6 63.3,35.35 72.1,35.35 72.1,15.55 65.9,15.55 65.9,19.8 58.75,19.8 58.75,19.7
  pour Top (no thermals): 71.35,30 81.8,30 81.8,20.5 71.3,20.5 71.3,20.25
  pour Top (no thermals): 79.6,36.4 85.7,36.4 85.7,14.9 99.2,14.9 79.54,14.9 79.54,22.96 79.69,23.1
  pour Top (no thermals): 104.95,24.7 83.2,24.7 83.2,31.95 104.85,31.95
  pour Bottom (no thermals): 105,24.7 90.4,24.7 90.4,32 105,32
CH1
  Top 0.254: J1.1 4.12,49.63 4.75,49 | C21.1 4.17,45.07 4.17,45.51 4.75,46.09 4.75,49 | U1.25 9.6,34.65 9.6,44.15 4.75,49
CH2  (via drill 0.2)
  Top 0.254: U1.26 7.87,34.75 v7.8,34.75 | J1.4 3.24,43.25 C22.1 4.17,43.08 4.17,42.64 4.31,42.5 6.9,42.5 7.45,41.95 v7.45,40.9
  Bottom 0.254: v7.45,40.9 7.45,39.87 7.43,39.89 7.43,35.12 v7.8,34.75
CH3  (via drill 0.2)
  Top 0.254: v7.25,34.15 8.13,33.27 U1.27 | J1.7 3.14,34.39 3.7,34.95 3.7,36.5 v6.85,39.65 6.21,39.01 4.17,41.04 4.17,41.48 C23.1
  Bottom 0.254: v6.85,39.65 6.85,34.55 v7.25,34.15
CLK
  Top 0.254: U3.1 8.25,22.05 8.25,24.39 U1.7
CLK(1)
  Top 0.254: U1.8 U3.3
COMBINE  (via drill 0.2)
  Top 0.254: v5.65,21.2 5.16,21.69 J1.12 | U1.9 12.9,22.93 12.9,22.05 10.62,19.77 8.93,19.77 v7.4,21.3
  Bottom 0.254: v7.4,21.3 7.3,21.2 v5.65,21.2
CPULED  (via drill 0.35)
  Top 0.254: R22.1 v16.05,24.75
  Top 0.406: v14.35,29.45 15.34,30.44 U1.17
  Bottom 0.254: v16.05,24.75 16.95,25.65 16.95,27.85 15.1,29.7 14.6,29.7 v14.35,29.45
GHA
  Top 0.254: CR4.1 R9.1 61.43,41.13 60.95,41.13 60.22,40.4 53.85,40.4 53.35,40.9 53.35,48.05 52.19,49.21 34.11,49.21 31.87,46.97 28.99,46.97 28.22,46.2 R6.2 26.32,45.52 IC5.10
GHA(1)  (via drill 0.35)
  Top 0.254: CR8.1 R19.1 64.2,10.45 57.8,10.45 57.2,9.85 57.2,5.05 54.55,2.4 34.55,2.4 33.35,3.6 31.75,3.6 v31.35,4 | IC4.10 22.77,8.28 24.7,10.2 R16.2 28.3,10.2 v28.4,10.1
  Bottom 0.254: v31.35,4 31.35,7.15 v28.4,10.1
GHB  (via drill 0.2, 0.35)
  Top 0.254: CR3.1 43.5,41.34 R7.1 44.01,41.34 v44.65,40.7 | v34.45,39.35 34.48,39.35 35.68,40.56 41.64,40.56 43.14,39.06 44.56,39.06 v44.65,39.15 | v28.85,41.8 R5.1 v34.45,41.8 | IC5.5 24.02,42.27 v24.15,42.4
  Bottom 0.254: v44.65,39.15 v44.65,40.7 | v34.45,39.35 v34.45,41.8 | v28.85,41.8 24.75,41.8 v24.15,42.4
GHB(1)
  Top 0.254: CR7.1 47.5,9.7 R17.1 46.85,10.4 35.35,10.4 35.1,10.15 35.1,6 34.9,5.8 R15.1 29.23,5.03 IC4.5
GLA  (via drill 0.35)
  Top 0.254: R10.1 CR5.1 60.34,35.6 53.05,35.6 52.6,36.05 52.6,47.4 51.25,48.75 34.5,48.75 32.4,46.65 v32.4,42.6 | v19.75,38.4 19.35,38.4 18.84,37.89 R3.1 | v20,47.4 20.57,46.83 IC5.12
  Bottom 0.254: v20,47.4 20.8,46.6 20.8,39.45 v19.75,38.4 20.45,38.4 21.35,37.5 30.6,37.5 32.4,39.3 v32.4,42.6
GLA(1)  (via drill 0.2)  (1 unrouted)
  Top 0.254: v32.3,12.9 27.3,12.9 R13.1 25.9,13.7 25.9,11.7 25.5,11.3 24.05,11.3 22.32,9.57 IC4.12 | v33.1,4.35 33.5,4.35 34.95,2.9 54.35,2.9 56.75,5.3 56.75,11.7 56.75,11.82 56.75,14.35 57.82,15.42 62.72,15.42 63.25,15.95 CR9.1
  Bottom 0.254: v33.1,4.35 33.1,12.1 v32.3,12.9
GLB
  Top 0.254: IC5.3 24.73,40.98 26.1,39.6 R4.2 34.5,38.3 36.35,40.15 41.34,40.15 42.84,38.65 43.3,38.65 44.5,37.45 44.5,34.56 CR6.1 R8.1
GLB(1)  (via drill 0.35)
  Top 0.254: v27.15,2.65 25.99,2.65 R14.2 25.94,3.16 25.38,3.73 IC4.3 | v34.25,6.7 34.55,7 34.55,12.1 35.9,13.45 39.26,13.45 CR10.1 40.74,13.59 R18.1
  Bottom 0.254: v27.15,2.65 27.65,2.15 33.55,2.15 34.25,2.85 v34.25,6.7
GND  (via drill 0.2, 0.35, 0.35 pad 0.55)  (1 unrouted)
  Top 0.254: CR6.2 44.5,29.44 C13.2 | J1.20 3.72,1.37 v3.9,1.55 | v23.15,2.3 23.55,2.7 R14.1 23.98,3.08 IC4.2 | v28.75,6.5 28.75,7.95 C17.2 33.7,8 34.1,8.4 34.1,16 | 18.6,16.65 LED1.1 17.75,17.4 LED2.1 | 20.85,16.65 18.6,16.65 | IC3.5 77.91,17.46 C30.2 77.66,19.26 C29.2 77.52,19.6 v78.7,19.6 | v72.95,30.95 73.8,30.95 C27.2 73.85,32.95 C28.2 74.09,33.3 IC2.5 | C7.1 26.4,49.27 v26.4,49.25 | v30.85,43.55 29.85,43.55 C10.2 | R3.2 20.44,34.49 19.65,33.7 C24.1 C25.1 13.85,34.55 13.85,33.39 U1.21 11.39,30.93 v11.39,29.8 U1.5 8.7,27.1 | U1.3 5.65,26.32 v5.65,26.1 4.65,26.1 2.78,24.23 J1.11 | C5.1 7.25,22.78 v7.25,22.65 7.25,22.3 9.37,20.18 9.75,20.18 10.4,20.84 10.4,21.61 10.05,21.97 10.03,21.97 U3.2 | v23.55,38.35 23.6,38.3 R4.1 24.55,38.3 24.55,39.35 23.57,40.33 IC5.2 | IC5.18 IC5.17 | IC5.18 17.23,46.17 v17.35,46.3 | C9.1 12.47,46.17 IC5.18 | v12.84,4.8 12.93,4.8 R12.2 | C16.1 v11.95,6.3 | IC4.17 IC4.18 17.07,8.93 v17.3,8.7 | C20.2 42.81,16.71 CR10.2 | v8.2,36.7 C31.2 | C21.2 6.35,44.9 v6.4,44.85 | v6.35,43.25 C22.2 | C23.2 6.3,41.65 v6.35,41.6 | v10.4,40.3 10.43,40.27 R2.2 | 18.6,16.65 18.37,16.42 C14.1 17.77,14.35 D1.A | R13.2 29.6,14 30.8,15.2 30.8,16.1
  Top 0.406: U2.2 9.76,11.45 v9.8,11.4
  Bottom 0.254: v23.15,2.3 24.25,3.4 28.7,3.4 28.75,3.45 v28.75,6.5
  other vias: 42.05,17.7 42.85,17.7 43.65,17.7 44.45,17.7 44.45,18.5 43.65,18.5 42.85,18.5 42.05,18.5 42.05,19.3 42.85,19.3 43.65,19.3 44.45,19.3 40.65,19.5 39.85,19.5 39.05,19.5 40.65,18.75 39.85,18.75 39.05,18.75 39.05,18 39.85,18 40.65,18 38.25,18 38.25,18.75 38.25,19.5 37.45,19.5 37.45,18.75 37.45,18 36.65,18 36.65,18.75 36.65,19.5 35.85,18 35.85,18.75 35.85,19.5 35.05,18 35.05,18.75 35.05,19.5 60.05,14.05 60.75,14.05 61.45,14.05 62.15,14.05 63.65,13.25 60.05,13.3 60.75,13.3 61.45,13.3 62.15,13.3 62.85,13.3 37.35,36.9 38.1,36.9 38.85,36.9 39.6,36.9 40.4,36.9 41.2,36.9 42,36.9 42,36.15 41.2,36.15 40.4,36.15 39.6,36.15 38.85,36.15 38.1,36.15 37.35,36.15 37.35,35.35 38.1,35.35 38.85,35.35 39.6,35.35 40.4,35.35 41.2,35.35 42,35.35 54.9,37.6 55.85,37.6 56.8,37.6 57.75,37.6 58.7,37.6 59.65,37.6 54.9,36.6 55.85,36.6 56.8,36.6 57.75,36.6 58.7,36.6 59.65,36.6 53.95,36.6 53.95,37.6 53.95,38.5 53.95,39.4 100.5,16.95 101.3,16.95 102.1,16.95 102.9,16.95 102.9,16.15 102.1,16.15 101.3,16.15 100.5,16.15 100.5,15.35 101.3,15.35 102.1,15.35 102.9,15.35 103.7,16.95 103.7,16.15 103.7,15.35 94.6,33 95.5,33 96.4,33 97.3,33 93.7,33 94.6,33.8 93.7,33.8 92.8,33 97.3,33.8 96.4,33.8 99,33 99,33.8 95.5,33.8 17.3,9.55 17.3,7.85 17.3,7 17.3,6.15 17.3,5.3 17.3,4.45 17.3,3.6 18.1,3.6 18.1,4.45 18.1,5.3 18.1,6.15 18.1,7 18.1,7.85 18.1,8.7 18.1,9.55 17.35,40.7 17.35,41.5 17.35,42.3 17.35,43.1 17.35,43.9 17.35,44.7 17.35,45.5 17.35,47.1 17.35,47.9 18.15,47.9 18.15,47.1 18.15,46.3 18.15,45.5 18.15,44.7 18.15,43.9 18.15,43.1 18.15,42.3 18.15,41.5 18.15,40.7 98.16,33.8 98.16,33 91.3,18.95 91.4,20.45 95.6,20.45 97,20.45 97,18.95 95.6,18.95 94.2,18.95 92.8,18.95 93.4,17.75 94.9,17.75 96.3,17.75 97.8,17.75 98.3,20.45 98.6,18.95 99.7,17.75 94.2,21.95 95.6,21.95 97,21.95 103.5,23.15 103.7,17.95 92.8,21.95 94.2,20.45 92.8,20.45 99.2,23.05 98.3,21.95
  pour Top (no thermals): 20.83,15.9 42.35,15.9 42.35,10.8 45.55,10.8 45.55,18.95 48.8,18.95 48.8,22.25 43.4,22.25 43.4,25.3 28.65,25.3 28.65,28 23.75,28 23.75,24.55 28.1,24.55 28.1,17.5 20.75,17.5
  pour Top (no thermals): 36.75,39.7 36.75,30.4 44.5,30.4 44.5,31.95 40.05,31.95 40.05,39.65
  pour Top (no thermals): 42.45,30.55 42.45,29.8 44.45,29.8 44.45,30.6
  pour Top (no thermals): 40,37.7 42.4,37.7 42.4,31.45 40.05,31.45 40.05,31.6
  pour Top (no thermals): 53.4,39.65 53.4,36 62.35,36 62.35,38.45 58,38.45 58,39.65
  pour Top (no thermals): 90.05,14.75 90.05,24.15 104.85,24.15 104.85,14.75
  pour Bottom (no thermals): 106.55,24.2 106.55,16.01 105.55,15.01 106.55,24.2 87.95,24.2 87.95,32.45 100.1,32.45 100.1,36.45 62.75,36.45 62.75,40.1 52.55,40.1 52.55,37.8 36.5,37.8 36.5,20.5 34.45,20.5 34.45,11.7 43.85,11.7 43.85,15.7 59.5,15.7 59.5,12.05 82,12.05 82,14.9 105.33,15.02 109.25,18.93 109.25,21.5
  pour Bottom (no thermals): 36.8,37.65 34.05,37.65 34.05,50.15 -0.05,50.15 -0.05,0 35,0 35,19.75 37.2,19.75 37.2,19.45
  pour Top (no thermals): 16.55,10.6 16.55,2.9 20,2.9 20,9.75 19.35,9.75 19.35,10.6
  pour Top (no thermals): 16.35,39.55 16.35,48.6 19.9,48.6 19.9,46.65 20.35,46.65 20.35,39.55
  pour Top (no thermals): 94.25,16.7 94.25,14.9 104.85,14.9 104.85,16.65
  pour Top (no thermals): 100.2,32.4 90.3,32.4 90.3,36.5 100.2,36.5
  pour Top (no thermals): 59.5,11.1 59.5,14.7 63.9,14.7 63.9,11.1
MIX
  Top 0.254: J1.10 4.97,26.77 U1.2
MODE  (via drill 0.2)
  Top 0.254: v9.25,16.1 8.35,16.1 5.3,19.15 J1.13 | v11.5,26.5 11.59,26.5 U1.11
  Bottom 0.254: v9.25,16.1 10.2,17.05 10.2,25.3 11.4,26.5 v11.5,26.5
N$1
  Top 0.254: C12.2 28.57,44.88 IC5.9
N$2
  Top 0.254: IC5.15 14.3,49.13 C8.2
N$3
  Top 0.508: CR1.1 34.96,26.2 IC1.7
  pour Top (no thermals): 34.35,25.7 40.7,25.7 40.7,29.5 39.6,29.5 39.6,27.35 34.41,27.35
  pour Top (no thermals): 36.63,27 39.7,27 39.7,29.63
N$5
  pour Top (no thermals): 28.95,27.15 33.75,27.15 33.75,32.75 28.98,32.75
N$6  (1 unrouted)
  Top 0.254: R1.1 19.69,24.64 L2.2
  pour Top (no thermals): 23.15,17.95 27.7,17.95 27.7,24.05 23.45,24.05 23.45,25.3 20.2,25.3 20.2,22.65 23.15,22.65
  pour Top (no thermals): 24.7,32.7 28.25,32.7 28.25,28.5 23.45,28.5 23.45,25 21.9,25 21.9,29.75 24.7,29.75
  pour Top (no thermals): 22.83,29.3 25.1,29.3 25.1,31.79
N$7  (via drill 0.35)
  other vias: 97.5,42.1 97.5,40.9 97.5,39.7 97.5,38.5 96.2,38.5 96.2,39.7 96.2,40.9 96.2,42.1 94.9,42.1 94.9,40.9 94.9,39.7 94.9,38.5 93.6,38.5 93.6,39.7 93.6,40.9 93.6,42.1 92.2,42.1 92.2,40.9 92.2,39.7 92.2,38.5
  pour Top (no thermals): 76.3,49.75 76.3,40.95 81.35,40.95 81.35,37.4 104.25,37.4 104.25,43.25 98.1,43.25 98.1,49.85
  pour Bottom (no thermals): 107.2,37.1 90.8,37.1 90.8,43 107.2,43
N$8
  Top 0.254: LED1.2 17.8,21.15 R1.2
N$9
  Top 0.254: IC5.27 13.4,40.33 R2.1
N$11
  Top 0.254: C11.1 27,41.75 25.73,43.02 21.5,43.02 IC5.6
N$12
  Top 0.254: C17.1 25.95,8 24.93,6.97 IC4.8 IC4.7
N$13
  pour Top (no thermals): 99.25,36.45 81.25,36.35 83.2,36.35
N$15
  Top 0.254: Q2.4 46.09,39.35 45.5,39.95 R7.2
N$16
  Top 0.254: Q8.4 70.11,14.7 69.6,15.2 65.91,15.2 64.85,14.14 R19.2
N$18
  Top 0.254: IC4.28 16.07,2.42 16.35,2.7 16.35,6.1 16.12,6.33 IC4.22 IC4.21 IC4.20 12.97,7.62 C16.2
N$22
  Top 0.254: IC4.16 12.88,10.22 C15.1
N$23
  Top 0.254: IC4.15 14.28,11.85 C15.2
N$24  (via drill 0.35)  (1 unrouted)
  other vias: 97.6,13.3 97.6,12 97.6,10.7 97.6,9.4 96.2,9.4 96.2,10.7 96.2,12 94.8,9.4 94.8,10.7 94.8,12 94.8,13.3 96.2,13.3
  pour Top (no thermals): 76.3,0.61 76.3,10.2 94.15,10.2 94.15,2.75 91.97,0.57
  pour Top (no thermals): 104.6,8.2 104.6,14.4 79.5,14.4 79.5,8.2
N$29
  Top 0.254: Q6.4 54.1,14.6 53.35,15.35 50.15,15.35 49.3,14.5 49.3,12.85 R17.2
N$31
  Top 0.254: Q1.4 40.91,38.4 41.2,38.1 43.2,38.1 43.5,37.8 R8.2
N$32
  Top 0.254: R10.2 62.45,31.3 62.7,31.55 62.7,38.7 62.14,39.26 Q3.4
N$33  (via drill 0.2)
  Top 0.254: C26.1 3.95,31.95 v3.9,31.95 | v3.25,14.05 3.23,14.07 J1.15
  Bottom 0.254: v3.9,31.95 3.55,31.6 3.55,14.35 v3.25,14.05
N$34
  Top 0.254: IC4.27 14,3.08 R12.1
N$35
  Top 0.254: 21.43,43.55 28.15,43.55 C10.1 | IC5.7 21.43,43.55 | IC5.8 21.43,44.2 21.43,43.55
N$36
  Top 0.254: IC5.16 13.9,47.48 C8.1
N$39
  Top 0.254: IC5.21 IC5.20 | IC5.21 IC5.22 | IC5.21 12.07,44.23 C9.2 | IC5.21 16.18,44.23 16.45,43.95 16.45,39.9 16.23,39.67 IC5.28
N$41
  Top 0.254: C19.2 28.9,9.2 26.15,9.2 25.15,8.2 25.06,8.11 24.57,7.62 IC4.9
N$42
  Top 0.254: IC4.6 26.98,5.67 C18.1
N$49
  Top 0.254: R18.2 Q5.4
N$50
  Top 0.254: Q7.4 58.7,15.01 64.16,15.01 R20.2
N$52
  Top 0.254: IC2.6 75.36,33.16 C28.1
N$61
  Top 0.254: LED2.2 14.85,20.95 R22.2
N$63
  Top 0.254: U1.20 15,33.4 C25.2
N$73
  Top 0.254: C30.1 76.64,17.09 IC3.6
N$79
  Top 0.254: R9.2 63.3,39.8 64.1,39 Q4.4
PHASE  (via drill 0.35)
  Top 0.254: v12.75,38.8 12.75,38.3 10.45,36 10.45,32.35 7.5,29.4 6.43,29.4 U1.32 | v13.45,45.15 13.82,45.52 IC5.19
  Bottom 0.254: v13.45,45.15 12.7,44.4 12.7,38.85 v12.75,38.8
PHASE(1)  (via drill 0.35)
  Top 0.254: U1.1 5.97,28.9 7,28.9 v7.25,28.65 | v13.3,8.45 13.47,8.28 IC4.19
  Bottom 0.254: v13.3,8.45 6.2,8.45 4.95,9.7 4.95,26.35 v7.25,28.65
PIN_5V
  Top 0.406: 0.65,40.3 0.65,46.6 1.14,47.09 J1.2 3.1,47.09 D2.1 | 0.65,40.3 0.65,32.35 | 0.65,32.35 1.15,31.85 J1.8 | 0.65,32.35 0.65,7.8 J1.18 | J1.5 1.48,39.47 0.65,40.3
PWMH  (via drill 0.35)
  Top 0.254: v12.65,27.9 12.65,27.71 U1.13 | IC5.23 15.2,43.02 12.12,43.02 v11.9,42.8
  Bottom 0.254: v12.65,27.9 12.85,28.1 12.85,36.7 11.25,38.3 11.25,42.15 v11.9,42.8
PWMH(1)  (via drill 0.35)
  Top 0.254: v15.35,26.2 15.29,26.2 U1.14 | v13.45,6.2 13.97,5.67 IC4.23
  Bottom 0.254: v13.45,6.2 14.8,7.55 14.8,25.65 v15.35,26.2
RESET  (via drill 0.35)
  Top 0.254: v10.8,10.05 10.8,6.45 11.74,5.51 13.49,5.51 13.97,5.03 IC4.24 | v10.95,15.9 10.95,17.4 v11.8,18.25 | v13.35,23.7 13.26,23.7 U1.10 | v13.65,42.35 15.22,42.35 IC5.24
  Bottom 0.254: v10.8,10.05 10.8,15.75 v10.95,15.9 | v11.8,18.25 13.35,19.8 v13.35,23.7 13.35,36.4 13.65,36.7 v13.65,42.35
RX  (via drill 0.2, 0.35)
  Top 0.254: v7.4,30.75 7.34,30.75 U1.30 5.94,32.15 5.35,32.15 4.3,31.1 4.3,30.2 v4.65,29.85 | v3.7,8.95 2.04,8.95 J1.17
  Bottom 0.254: v3.7,8.95 4.45,9.7 4.45,29.65 v4.65,29.85
SA  (1 unrouted)
  Top 0.254: 56.55,46.35 56.7,46.2 | 54.35,49.6 54.31,49.64 33.75,49.64 31.81,47.7 C12.1 29.9,47.8 R6.1 25.38,46.17 IC5.11
  pour Top (no thermals): 54.2,40.9 54.2,49.75 75.95,49.75 75.95,40.95 62.85,40.95 62.85,44.45 60.15,44.45 60.15,40.9
  pour Top (no thermals): 65,36.35 65,41.1 72.5,41.1 72.5,36.35
SA(1)  (via drill 0.35)  (1 unrouted)
  Top 0.254: v32.35,2.9 33.2,2.9 34.2,1.9 54.7,1.9 58.25,5.45 | v32.3,8.85 32.3,11.1 31.7,11.7 C19.1 29.9,11.8 R16.1 25.95,10.75 24.3,10.75 22.48,8.93 IC4.11
  Bottom 0.254: v32.3,8.85 32.3,2.95 v32.35,2.9
  pour Top (no thermals): 58.15,9.95 59.9,9.95 59.9,6.55 65.9,6.55 65.9,14.65 69.2,14.65 69.2,10.1 76,10.1 76,0.65 58.09,0.65
SB  (via drill 0.35)
  Top 0.254: IC5.4 25.68,41.62 C11.2 29.9,40.3 R5.2 34.55,40.2 35.75,41.4
  other vias: 47.65,45.1 48.6,45.1 49.55,45.1 50.5,45.1 50.5,44.15 49.55,44.15 48.6,44.15 47.65,44.15 47.65,40.5 48.6,40.5 49.55,40.5 50.5,40.5 50.5,39.6 49.55,39.6 48.6,39.6 47.65,39.6 36.05,46.45 36.95,46.45 37.85,46.45 38.75,46.45 39.65,46.45 40.55,46.45 41.45,46.45 47.65,46 48.6,46 49.55,46 50.5,46 46.75,46 45.8,46 36.05,47.65 36.95,47.65 37.85,47.65 38.75,47.65 39.65,47.65 40.55,47.65 41.45,47.65
  pour Top (no thermals): 46.9,40.85 35.45,40.85 35.45,48.3 51.5,48.3 51.5,35.95 46.9,35.95
  pour Bottom (no thermals): 35.4,49.95 35.4,43.9 46.55,43.9 46.55,38.75 51.55,38.75 51.55,43.35 105.95,43.35 105.95,49.85
  pour Bottom: 35.4,44 35.4,40.8 42.6,40.8 42.6,44 35.4,44 35.4,43.9
SB(1)  (via drill 0.2)
  Top 0.254: IC4.4 26.93,4.38 C18.2 29.9,4.3 R15.2 31.1,5.3 36,5.3
  other vias: 49.65,5 50.4,5 51.15,5 51.9,5 52.65,5 52.65,5.75 51.9,5.75 51.15,5.75 50.4,5.75 49.65,5.75 36.75,5 37.5,5 38.25,5 39,5 39.75,5 40.5,5 41.25,5 51.8,10.25 50.85,12.85 51.75,12.85 52.65,12.85 52.65,12.1 51.75,12.1 50.85,12.1 51.8,9.5 51.8,8.75 50.85,11.35 51.75,11.35 52.65,11.35
  pour Top (no thermals): 49.8,10.05 35.45,10.05 35.45,3.9 53.3,3.9 53.3,14.6 49.8,14.6
  pour Bottom (isolate 0.305, no thermals): 35.35,10.2 45.3,10.2 45.3,14.5 57.95,14.5 57.95,7.45 105.5,7.45 105.5,-0.25 35.3,-0.25 35.3,1.8
  pour Bottom: 82,7 82,10 51.4,10 51.4,7
TX  (via drill 0.2)
  Top 0.254: U1.31 6.8,30.16 v6.8,30.15 | v3.5,11.55 3.48,11.53 J1.16
  Bottom 0.254: v3.5,11.55 4,12.05 4,30.5 5.05,31.55 5.4,31.55 v6.8,30.15
VIOUT  (via drill 0.35)
  Top 0.254: v76.65,33.85 76.64,33.87 IC2.7 | U1.23 12.04,34.02 14.62,36.6 v16.05,36.6
  Bottom 0.254: v76.65,33.85 72.15,33.85 71.4,34.6 71.4,41.05 70.45,42 52.65,42 52.1,41.45 52.1,38.85 51.7,38.45 35.95,38.45 35.35,37.85 35.35,37.15 34.05,35.85 17.75,35.85 17,36.6 v16.05,36.6
VIOUT(1)  (via drill 0.35)
  Top 0.254: U1.24 11.5,34.4 14.7,37.6 16.4,37.6 17,37 v17,35.25 | v75.2,16.75 75.36,16.59 IC3.7
  Bottom 0.254: v75.2,16.75 71.75,16.75 71.25,16.25 71.25,11.95 70.45,11.15 59.55,11.15 59.1,11.6 59.1,13.8 57.95,14.95 45.8,14.95 44.3,13.45 44.3,11.4 43.65,10.75 33.75,10.75 33.65,10.85 33.65,13.05 31.35,15.35 17.05,15.35 16.7,15.7 16.7,23.85 17.85,25 17.85,34.4 v17,35.25
(copper drawn outside any net)
  shapes: Bottom area x1, Top area x4

## Text on the board
tPlace: CH1 | 5V | CH3 | FAN | 120mA MAX | + | - | MIX | COMBINE | MODE | #RTS | TX | 10 | 30 | 50 | 70 | RX | A | 90 | OFF | AMPS LIMIT | 5V | GND
tNames: :3 | RageBridge V3 | Reverse Engineered by Cormac McCreary | ඞ | RageBridge V2 by Charles Z Guan